# Altium PCB LNA.PcbDoc
Units mm, origin at the board's own origin, x right, y up, seen from the top; angles counter-clockwise.
Board outline 75.69 x 48.01 mm, 2 copper layers (Top Layer, Bottom Layer); 10 components, 0 nets, 21 pads, 92 vias.
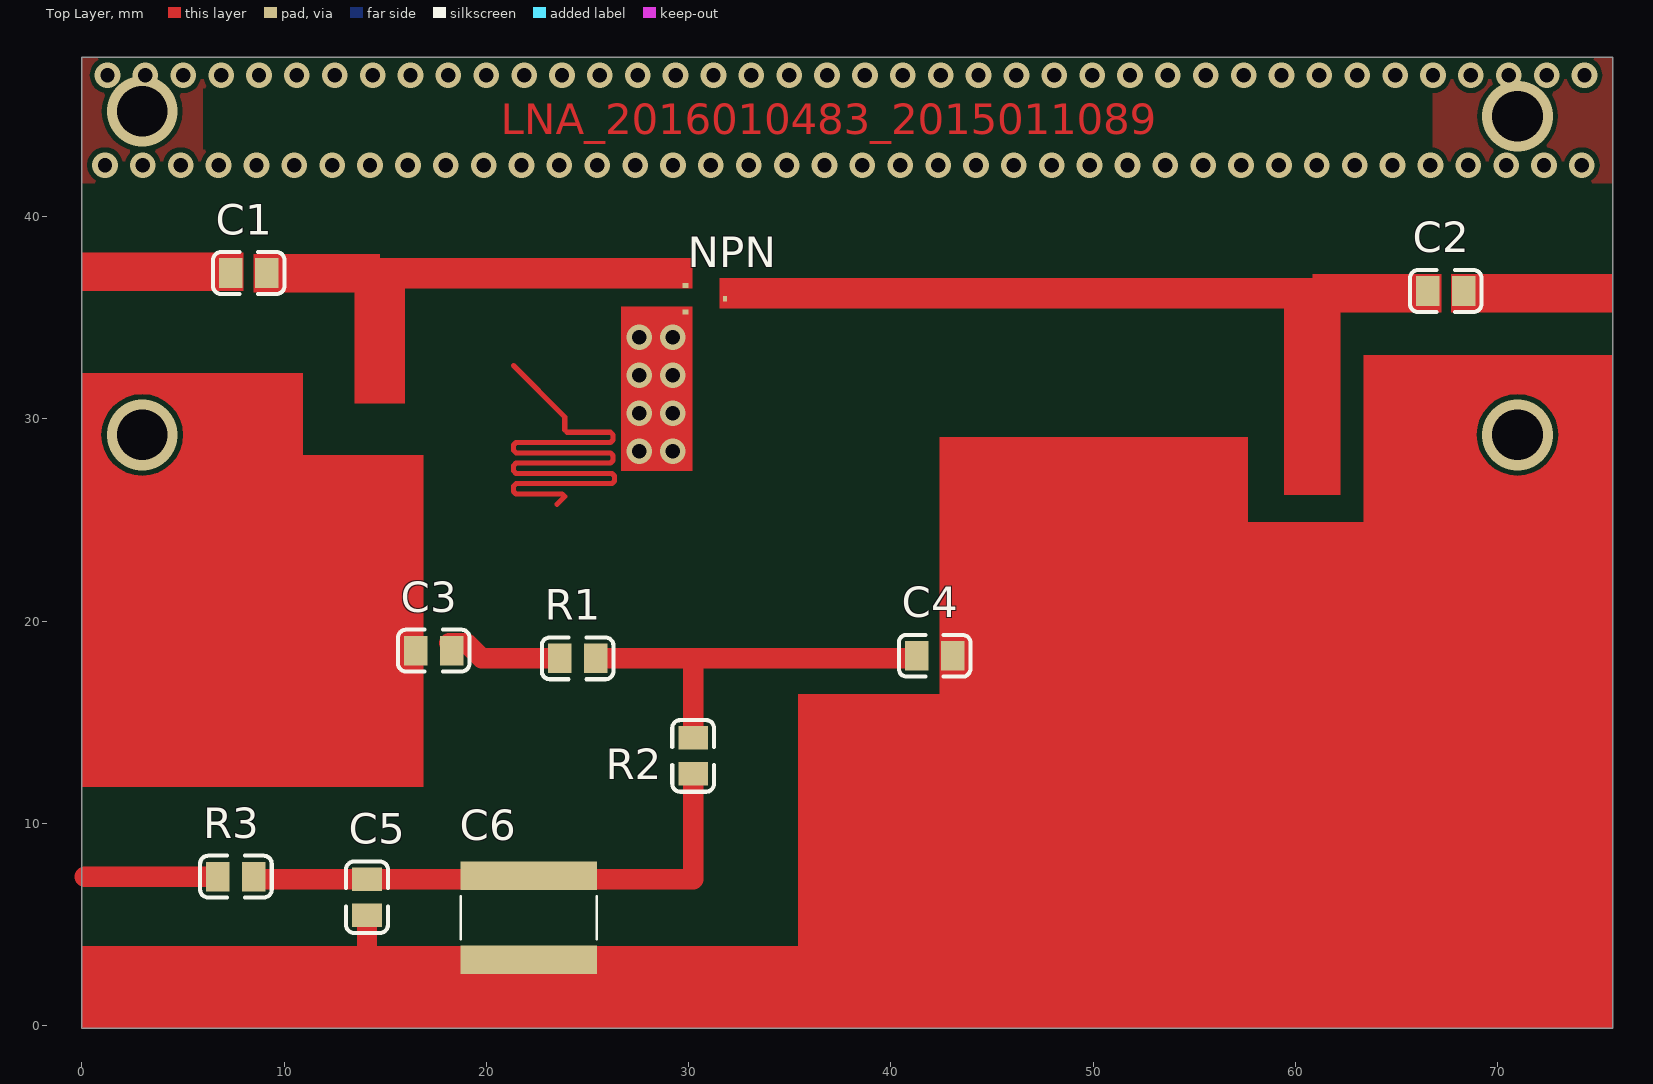
[diagram p0: Top Layer view]
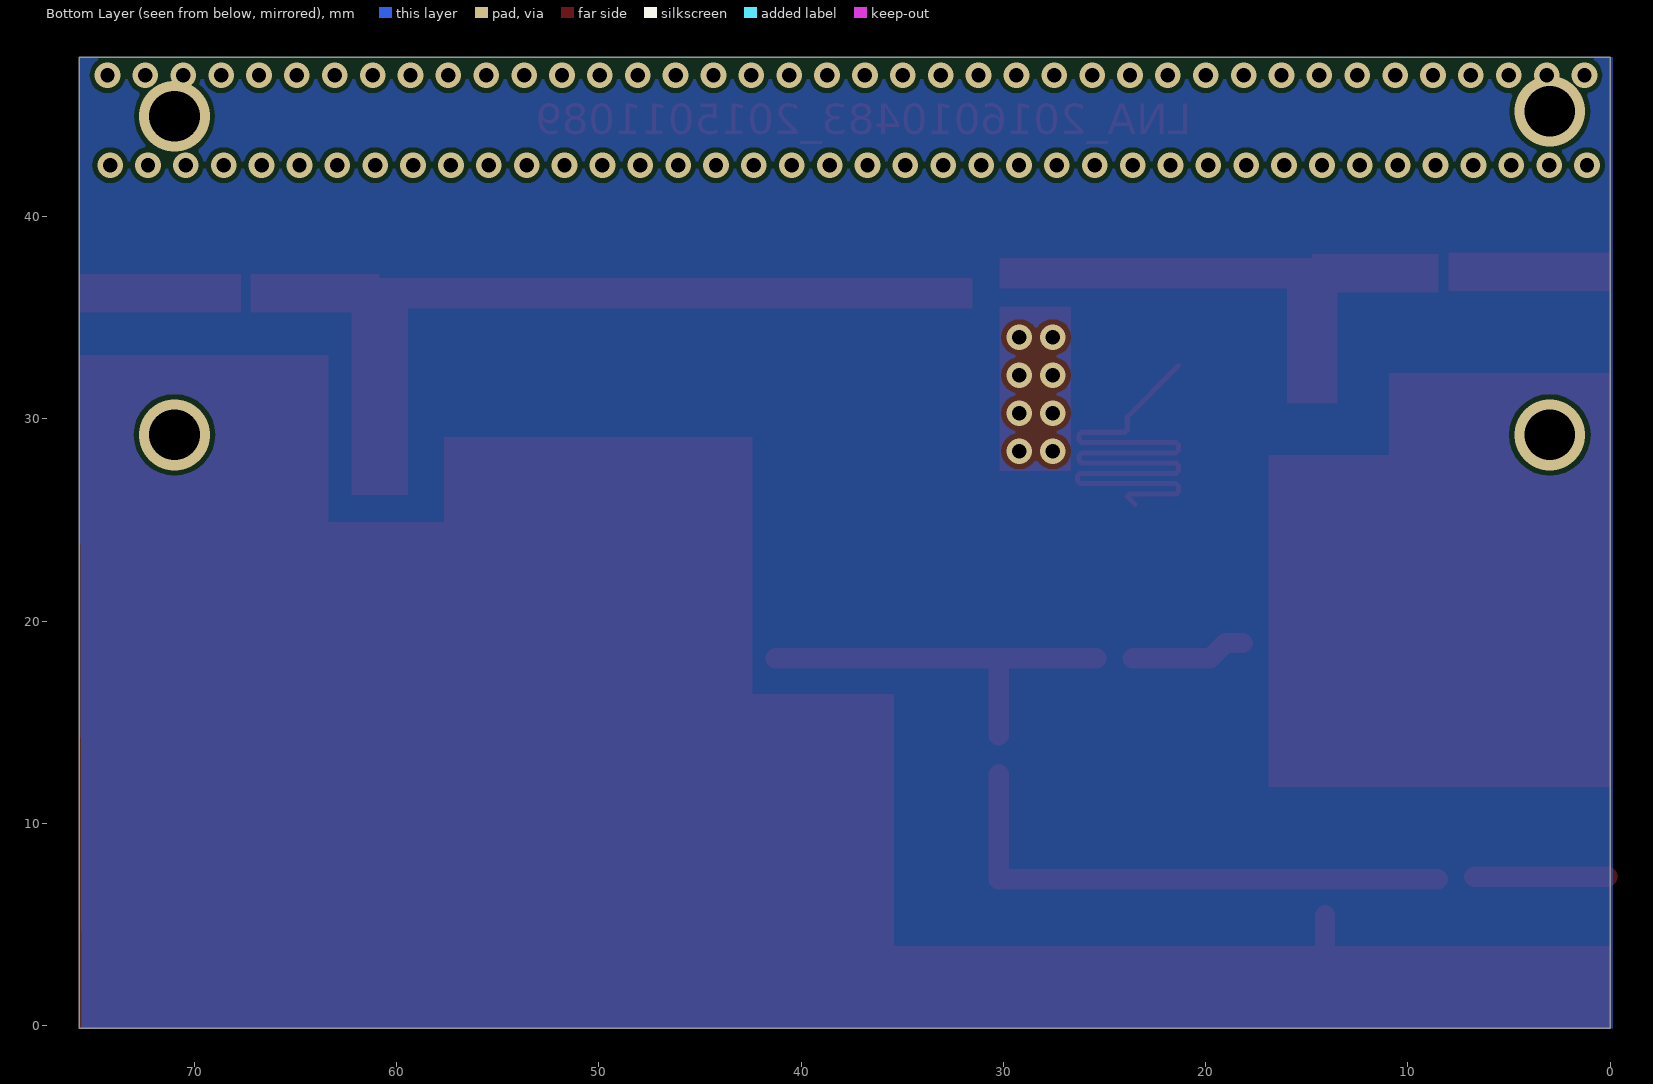
[diagram p1: Bottom Layer view, seen from below]

## Layer stack, top to bottom
Top Solder: solder mask 0.0102, Solder Resist, Dk 3.5
Top Layer: signal copper 0.0356
Dielectric 1: dielectric 0.32, FR-4, Dk 4.8
Bottom Layer: signal copper 0.0356
Bottom Solder: solder mask 0.0102, Solder Resist, Dk 3.5

## Board outline
0,-0.127 75.692,-0.127 75.692,47.879 0,47.879

## Design rules (kind name [scope] priority, off if disabled: settings)
Clearance [All] p1: gap=0.254 ignorepadtopadclearanceinfootprint=FALSE except(0: Arc-Hole Track-Hole SMDPad-Hole THPad-Hole Via-Hole Fill-Hole Poly-Hole Region-Hole Text-Hole)
PolygonConnect [All] p1: connectstyle=Relief reliefconductorwidth=0.254 reliefentries=4 polygonreliefangle="90 Angle" airgapwidth=0.254
RoutingVias [All] p1: holewidth=0.711 width=1.27 viastyle="Through Hole" minholewidth=0.711 minwidth=1.27 maxholewidth=0.711 maxwidth=1.27
SolderMaskExpansion [All] p1: expansion=0.102
Width [All] p1: maxlimit=2 minlimit=0.254 preferedwidth=1 bottomlayer_maxwidth=0.254 bottomlayer_prefwidth=0.254 minimp=50.000000 maximp=50.000000 favimp=50.000000
30 further rules are at their usual default settings.

## Components (designator, comment, footprint, x,y, rotation, side; value= is the part's Value field where it differs from the comment)
C1 "Comment" 0805_C 8.254,37.211 r180 top
C2 "Comment" 0805_C 67.437,36.322 r180 top
C3 "Comment" 0805_C 17.399,18.542 r180 top
C4 "Comment" 0805_C 42.164,18.288 r180 top
C5 "Comment" 0805_C 14.097,6.35 r90 top
C6 "Comment" *CAPC4563X203N 22.098,5.334 r90 top
NPN "Comment" SOT95P245X110-3N 29.845,35.941 r0 top
R1 "Comment" 0805_C 24.511,18.161 r180 top
R2 "Comment" 0805_C 30.226,13.335 r270 top
R3 "Comment" 0805_C 7.62,7.366 r0 top

## Footprints (in the part's own frame and the unit in brackets; to place one, negate y for a bottom-side part, rotate by r counter-clockwise, add the part's x,y. Pads: shape width x height; smd on the part's side, far side on the other; paste and mask are expansions set on the pad)
0805_C [mm]
  rect 1.16x1.47 smd: 1(-0.89,0) 2(0.89,0)
  silkscreen extent -1.77,-1.04 1.77,1.04, body extent -1,-0.62 1,0.63, height 0.77
*CAPC4563X203N [mm]
  rect 1.41x6.74 smd: 1(-2.085,0) 2(2.085,0)
  silkscreen extent -1.06,-3.37 1.06,3.37
SOT95P245X110-3N [mm] "SOT23, 3-Leads, Body 2.90x2.45mm, Pitch 0.95mm, IPC Medium Density"
  rect 0.3x0.25 smd mask+0.102: 1(0,0.65)
  rect 0.3x0.25 smd: 2(0,-0.65)
  rect 0.2x0.25 smd: 3(1.95,0)

## Via types
v1: diameter 1.27, hole 0.711, Top Layer to Bottom Layer, 88 vias
v2: diameter 3.5, hole 2.5, Top Layer to Bottom Layer, 4 vias

## Nets (pads, with @x,y where several pads share a name; then routed paths per layer and width w, separated by ;. In a path a pad name is that pad's centre, name@x,y a point inside that pad or via, vN(x,y) a via of type N, cw(c..) or ccw(c..) an arc to the next point about the centre after c; other vN are vias at no path point)
pads on no net: C1.1 C1.2 C2.1 C2.2 C3.1 C3.2 C4.1 C4.2 C5.1 C5.2 C6.1 C6.2 NPN.1 NPN.2 NPN.3 R1.1 R1.2 R2.1 R2.2 R3.1 R3.2
copper on no net: | length 98.9
  Top Layer w0.254: 15.367,31.623 15.367,32.512 ; 21.336,32.639 23.876,30.099 23.876,29.464 24.003,29.337 26.139,29.337 26.266,29.21 26.266,28.956 26.139,28.829 21.463,28.829 21.336,28.702 21.336,28.448 21.463,28.321 26.139,28.321 26.266,28.194 26.266,27.94 26.139,27.813 21.463,27.813 21.336,27.686 21.336,27.432 21.463,27.305 26.215,27.305 26.342,27.178 26.342,26.924 26.215,26.797 21.463,26.797 21.336,26.67 21.336,26.416 21.463,26.289 23.749,26.289 23.876,26.162 23.495,25.781
  Top Layer w1: 0.127,7.366 6.73,7.366 ; 8.51,7.239 30.226,7.239 30.226,12.445 ; 14.097,3.175 14.097,5.46 ; 18.162,18.923 19.01,18.923 19.772,18.161 23.621,18.161 ; 25.401,18.161 30.226,18.161 ; 30.226,14.352 30.226,18.161 ; 41.274,18.161 30.226,18.161
  other v1: 27.559,28.406 29.21,28.406 27.559,30.282 29.21,30.282 27.559,32.159 29.21,32.159 27.559,34.036 29.21,34.036 1.143,42.545 3.015,42.545 4.888,42.545 6.76,42.545 8.633,42.545 10.505,42.545 12.378,42.545 14.25,42.545 16.122,42.545 17.995,42.545 19.867,42.545 21.74,42.545 23.612,42.545 25.485,42.545 27.357,42.545 29.23,42.545 31.102,42.545 32.974,42.545 34.847,42.545 36.719,42.545 38.592,42.545 40.464,42.545 42.337,42.545 44.209,42.545 46.081,42.545 47.954,42.545 49.826,42.545 51.699,42.545 53.571,42.545 55.444,42.545 57.316,42.545 59.188,42.545 61.061,42.545 62.933,42.545 64.806,42.545 66.678,42.545 68.551,42.545 70.423,42.545 72.296,42.545 74.168,42.545 1.27,46.99 3.142,46.99 5.015,46.99 6.887,46.99 8.76,46.99 10.632,46.99 12.505,46.99 14.377,46.99 16.249,46.99 18.122,46.99 19.994,46.99 21.867,46.99 23.739,46.99 25.612,46.99 27.484,46.99 29.357,46.99 31.229,46.99 33.101,46.99 34.974,46.99 36.846,46.99 38.719,46.99 40.591,46.99 42.464,46.99 44.336,46.99 46.208,46.99 48.081,46.99 49.953,46.99 51.826,46.99 53.698,46.99 55.571,46.99 57.443,46.99 59.315,46.99 61.188,46.99 63.06,46.99 64.933,46.99 66.805,46.99 68.678,46.99 70.55,46.99 72.423,46.99 74.295,46.99
  other v2: 2.983,29.206 70.983,29.21 70.983,44.958 2.983,45.206

## Polygon pours and split planes (outlines as drawn)
no net on Top Layer "Top Layer-No Net 1" (solid, pour order 38): 5.969,46.355 5.969,43.307 66.802,43.307 66.802,46.355 5.969,46.355 5.969,47.879 75.692,47.879 75.692,41.656 0.127,41.656 0,41.656 0,47.879 5.969,47.879
no net on Top Layer "Top Layer-No Net 2" (solid, pour order 36): 0,47.879
no net on Top Layer "Top Layer-No Net 7" (solid, pour order 34): 40.132,27.432
no net on Top Layer "Top Layer-No Net 8" (solid, pour order 32): 41.021,26.797
no net on Top Layer "Top Layer-No Net 10" (solid, pour order 20): 70.866,19.304
no net on Top Layer "Top Layer-No Net 11" (solid, pour order 18): 73.279,17.78
no net on Top Layer "Top Layer-No Net" (solid, pour order 12): 66.802,66.929
no net on Top Layer "Top Layer-No Net 3" (hatched Horizontal grid 0.508 track 0.203, pour order 8): 31.877,54.102
no net on Top Layer "Top Layer-No Net 4" (solid, pour order 6): 27.686,57.15
no net on Top Layer "Top Layer-No Net 5" (solid, pour order 4): 16.891,50.546
no net on Top Layer "Top Layer-No Net 6" (solid, pour order 2): 16.891,50.546
no net on Bottom Layer "Bottom Layer-No Net 2" (solid, pour order 24): 75.692,47.879 -0.127,47.879 -0.127,-0.127 75.565,-0.127
no net on Bottom Layer "Bottom Layer-No Net" (solid, pour order 28): 0.064,47.816
no net on Bottom Layer "Bottom Layer-No Net 1" (solid, pour order 26): 0.064,47.816

## Other copper
Top Layer:
  rectangle: 67.691,35.249 75.691,37.164
  rectangle: 0.001,36.322 8.001,38.237
  rectangle: 60.84,35.249 62.84,37.164
  rectangle: 59.055,35.453 64.008,36.957
  rectangle: 59.443,34.417 62.23,36.96
  rectangle: 14.478,36.068 15.983,37.956
  rectangle: 13.483,36.068 14.732,38.164
  rectangle: 59.443,26.232 62.237,35.249
  rectangle: 26.647,27.412 30.183,35.56
  rectangle: 62.237,35.249 67.237,37.164
  rectangle: 31.523,35.453 59.443,36.96
  rectangle: 13.483,30.762 15.983,36.249
  rectangle: 8.483,36.249 13.843,38.163
  rectangle: 15.748,36.456 30.183,37.956
  region: 10.923,28.194 16.892,28.194 16.892,11.811 0.001,11.811 0.001,32.258 10.923,32.258 hole: 2.983,31.22 2.59,31.181 2.212,31.066 1.864,30.88 1.559,30.63 1.309,30.325 1.123,29.977 1.008,29.599 0.969,29.206 1.008,28.813 1.123,28.435 1.309,28.087 1.559,27.782 1.864,27.532 2.212,27.346 2.59,27.231 2.983,27.192 3.376,27.231 3.754,27.346 4.102,27.532 4.407,27.782 4.657,28.087 4.843,28.435 4.958,28.813 4.997,29.206 4.958,29.599 4.843,29.977 4.657,30.325 4.407,30.63 4.102,30.88 3.754,31.066 3.376,31.181
  region: 75.692,33.147 75.692,-0.127 0,-0.127 0,3.937 35.433,3.937 35.433,16.383 40.767,16.383 42.418,16.383 42.418,29.083 57.658,29.083 57.658,24.892 63.373,24.892 63.373,33.147 hole: 70.983,31.224 70.59,31.185 70.212,31.07 69.864,30.884 69.559,30.634 69.309,30.329 69.123,29.981 69.008,29.603 68.969,29.21 69.008,28.817 69.123,28.439 69.309,28.091 69.559,27.786 69.864,27.536 70.212,27.35 70.59,27.235 70.983,27.196 71.376,27.235 71.754,27.35 72.102,27.536 72.407,27.786 72.657,28.091 72.843,28.439 72.958,28.817 72.997,29.21 72.958,29.603 72.843,29.981 72.657,30.329 72.407,30.634 72.102,30.884 71.754,31.07 71.376,31.185
  region: 53.086,32.893
  region: 48.641,31.242
  text "LNA_2016010483_2015011089" at 20.701,44.069 h1.52